# Altium PCB Hydrophones_RA_Adapter_2.PcbDoc
Units mil, origin at the board's own origin, x right, y up, seen from the top; angles counter-clockwise.
Board outline 290 x 400 mil, 2 copper layers (Top Layer, Bottom Layer), stack 61.8 mil thick; 2 components, 0 nets, 28 pads, 0 vias.
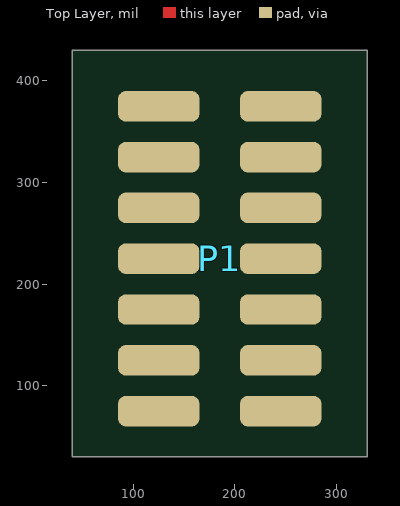
[diagram p0: Top Layer view]
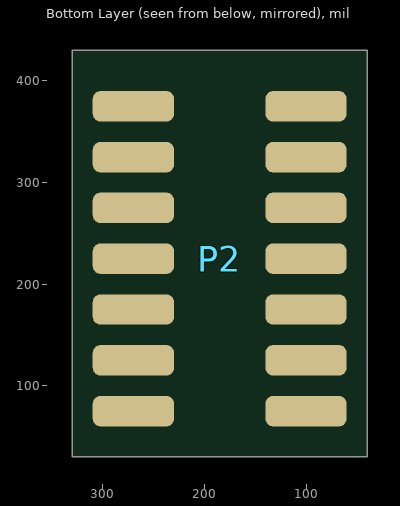
[diagram p1: Bottom Layer view, seen from below]

## Layer stack, top to bottom
Top Solder: solder mask 0.4, Solder Resist, Dk 3.5
Top Layer: signal copper 1.4
Dielectric 1: dielectric 59, FR-4, Dk 4.8
Bottom Layer: signal copper 1.4
Bottom Solder: solder mask 0.4, Solder Resist, Dk 3.5

## Board outline
40,30 40,430 330,430 330,30

## Design rules (kind name [scope] priority, off if disabled: settings)
Clearance [All] p1: gap=10 ignorepadtopadclearanceinfootprint=FALSE except(0: Arc-Hole Track-Hole SMDPad-Hole THPad-Hole Via-Hole Fill-Hole Poly-Hole Region-Hole Text-Hole)
PolygonConnect [All] p1: connectstyle=Relief reliefconductorwidth=10 reliefentries=4 polygonreliefangle="90 Angle" airgapwidth=10
RoutingVias [All] p1: holewidth=28 width=50 viastyle="Through Hole" minholewidth=28 minwidth=50 maxholewidth=28 maxwidth=50
SolderMaskExpansion [All] p1: expansion=4
Width [All] p1: maxlimit=10 minlimit=10 preferedwidth=10
30 further rules are at their usual default settings.

## Components (designator, comment, footprint, x,y, rotation, side; value= is the part's Value field where it differs from the comment)
P1 "Header 7X2" FTSH-103-01-L-DH 185,225 r90 top
P2 "Header 7X2" FTSH-107-01-F-DV 185,225 r270 bottom

## Footprints (in the part's own frame and the unit in brackets; to place one, negate y for a bottom-side part, rotate by r counter-clockwise, add the part's x,y. Pads: shape width x height; smd on the part's side, far side on the other; paste and mask are expansions set on the pad)
FTSH-103-01-L-DH [mil] "Connector Header Surface Mount, Right Angle 6 position 0.050\" (1.27mm)"
  rrect50% 30x80 smd: 1(150,60) 2(150,-60) 3(100,60) 4(100,-60) 5(50,60) 6(50,-60) 7(0,60) 8(0,-60) 9(-50,60) 10(-50,-60) 11(-100,60) 12(-100,-60) 13(-150,60) 14(-150,-60)
  body extent -175,-344 175,85, height 136
FTSH-107-01-F-DV [mil] "14 Position Receptacle Connector  Surface Mount, Right Angle"
  rrect50% 30x80 smd: 1(150,85) 2(150,-85) 3(100,85) 4(100,-85) 5(50,85) 6(50,-85) 7(0,85) 8(0,-85) 9(-50,85) 10(-50,-85) 11(-100,85) 12(-100,-85) 13(-150,85) 14(-150,-85)
  body extent -175,-115 175,115, height 236

## Part data
P1 P2: "Header, 7-Pin, Dual row", LatestRevisionDate=17-Jul-2002, LatestRevisionNote="Re-released for DXP Platform.", Publisher="Altium Limited"

## Nets (pads, with @x,y where several pads share a name; then routed paths per layer and width w, separated by ;. In a path a pad name is that pad's centre, name@x,y a point inside that pad or via, vN(x,y) a via of type N, cw(c..) or ccw(c..) an arc to the next point about the centre after c; other vN are vias at no path point)
pads on no net: P1.1 P1.2 P1.3 P1.4 P1.5 P1.6 P1.7 P1.8 P1.9 P1.10 P1.11 P1.12 P1.13 P1.14 P2.1 P2.2 P2.3 P2.4 P2.5 P2.6 P2.7 P2.8 P2.9 P2.10 P2.11 P2.12 P2.13 P2.14

## Silkscreen, mask and mechanical layers (free items; w line width, h text height)
Mechanical 1:
  the board outline again, w10